# EAGLE board sparklecon_badge (EAGLE 7.6.0)
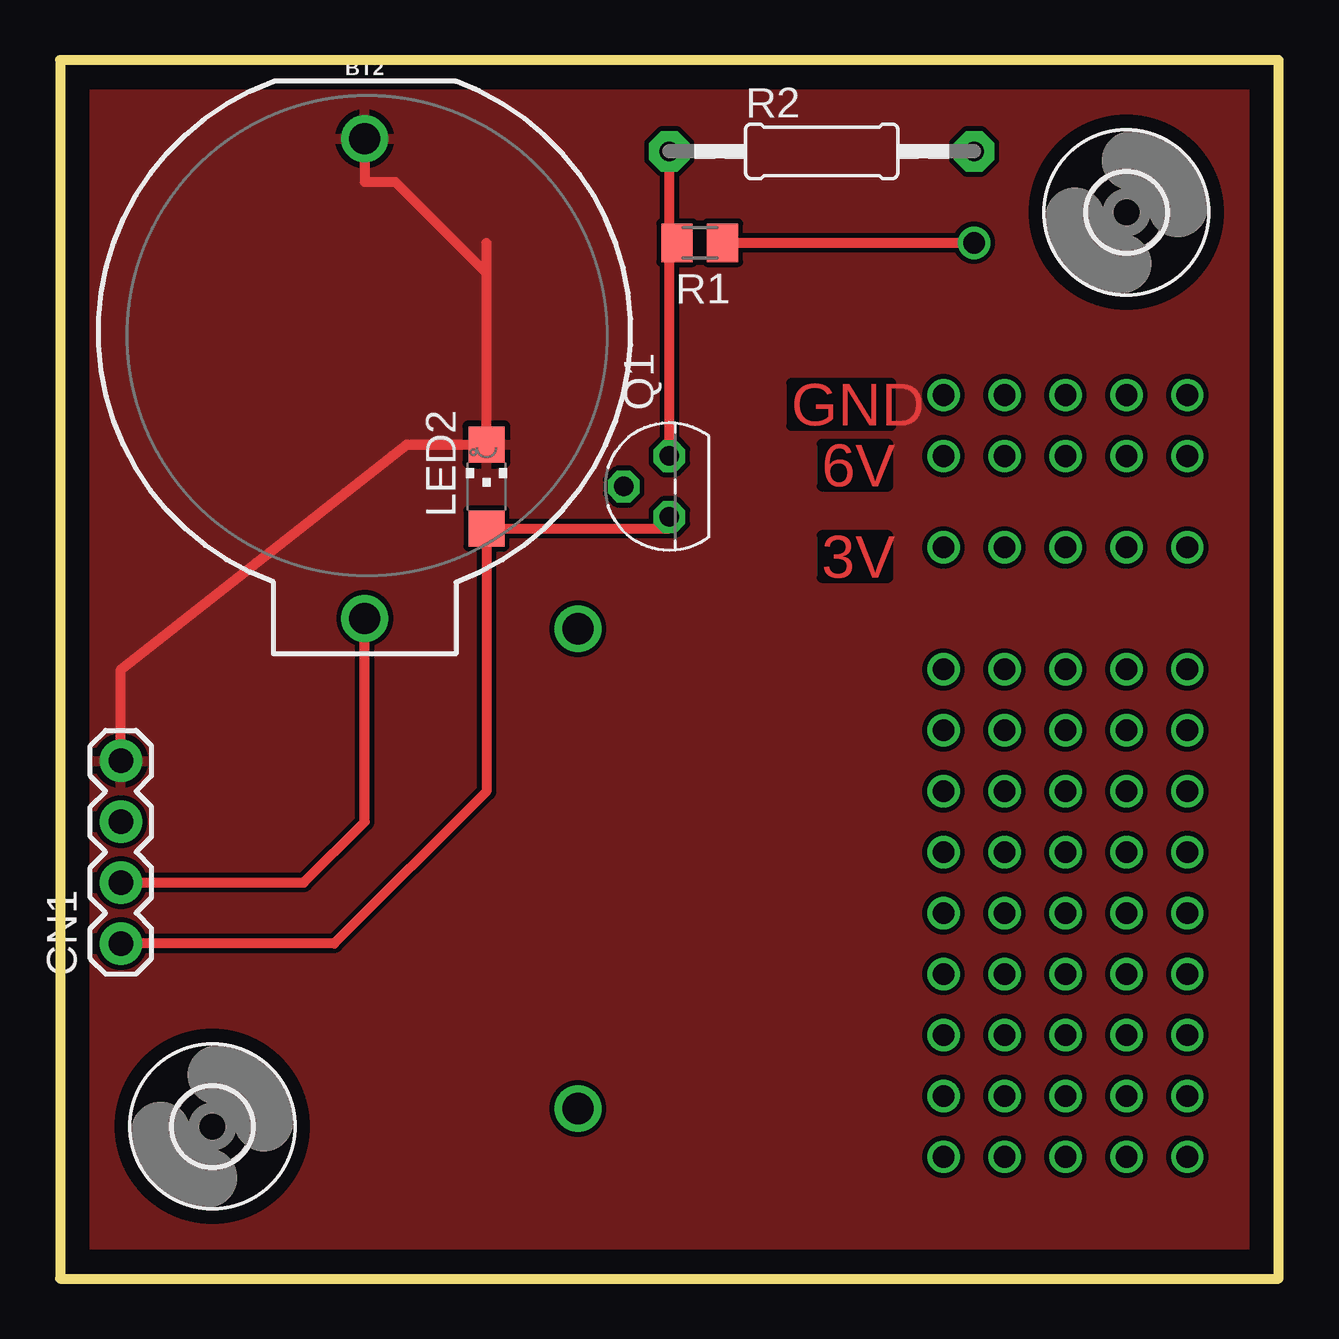
[diagram p0: board, top side]
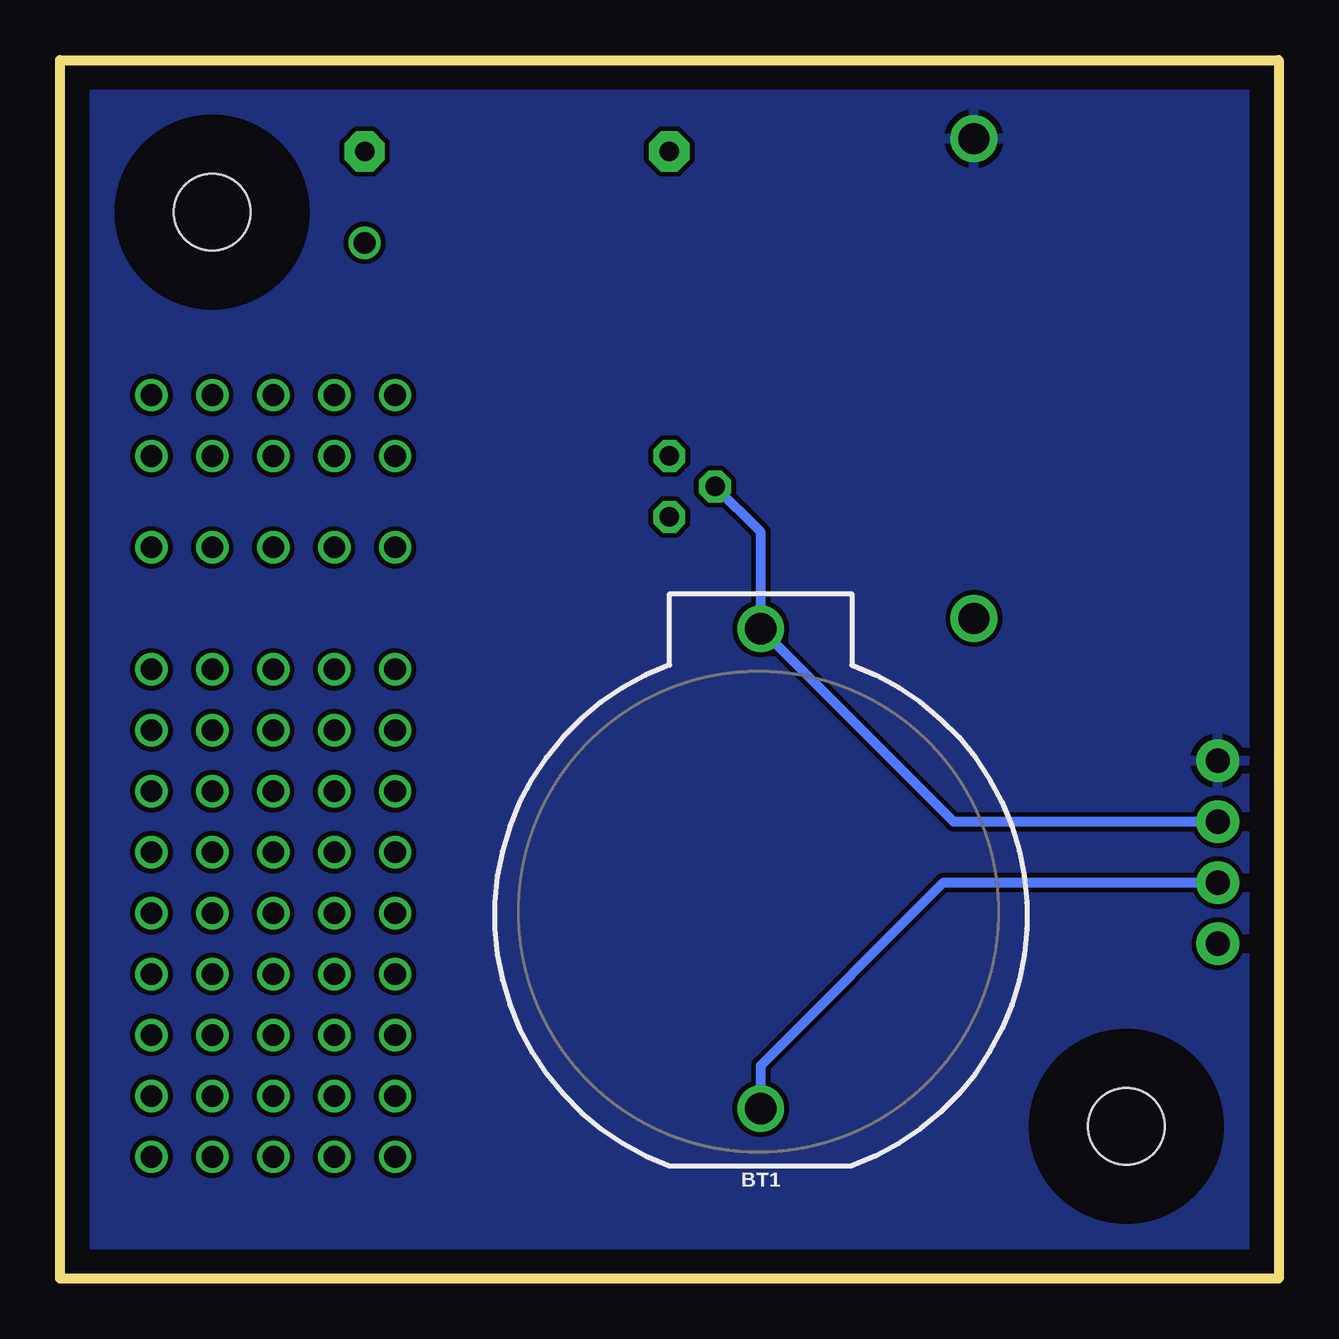
[diagram p1: board, bottom side, seen from below]

Size 50.8 x 50.8 mm. Coordinates in mm from the lower left corner, seen from the top.
Outline: 0,50.8 0,0 50.8,0 50.8,50.8 0,50.8
Copper layers (1*16): Top 0.035mm / dielectric 1.5mm / Bottom 0.035mm
Design rules "default": minimum track width 10mil, minimum drill 24mil, track to track 8mil, track to pad 8mil, pad to pad 8mil, via to via 8mil, smd to smd 8mil, copper to edge 40mil, drill to drill 8mil, minimum pad ring 10mil, minimum via ring 8mil, stop-mask expansion 4mil, vias tented up to drill 0mil, thermal gap 10mil

## Footprints (pad centres in the part's own frame; a part is rotated, then mirrored left to right if it is on the bottom)
BATTCOM_20MM_PTH = drill 1.3: 1 11.85,0; 2 -8.15,0
1X04-BIG = drill 1.016 pad 1.778: 1 0,0; 2 2.54,0; 3 5.08,0; 4 7.62,0
3,2 = hole 3.2: 0,0
CHIPLED_1206 = smd 1.5 x 1.5: A 0,-1.75; C 0,1.75
TO92 = drill 0.813 octagon: 1 1.27,0; 2 0,1.905; 3 -1.27,0
M0805 = smd 1.3 x 1.6: 1 -0.95,0; 2 0.95,0
0207/12 = drill 0.813 pad 1.676 octagon: 1 -6.35,0; 2 6.35,0

## Placement (x,y rotation side)
BT1  [BATTCOM_20MM_PTH]  21.59,15.24 90 bottom
BT2  [BATTCOM_20MM_PTH]  12.7,39.37 270 top
CN1  1X4-BIG  [1X04-BIG]  2.54,13.97 90 top
H1  MOUNT-HOLE3.2  [3,2]  6.35,6.35 0 top
H2  MOUNT-HOLE3.2  [3,2]  44.45,44.45 0 top
LED2  [CHIPLED_1206]  17.78,33.02 0 top
Q1  J113  [TO92]  25.4,33.02 90 top
R1  [M0805]  26.67,43.18 180 top
R2  [0207/12]  31.75,46.99 0 top

## Library data of the parts
BT1 BT2 = SparkFun-Batteries; PROD_ID: BATT-09031; SF_SKU: PRT-00783
CN1 LED2 R2 = adafruit
H1 H2 = holes
Q1 = transistor-fet
R1 = resistor

## Nets
3V: BT1.2 BT2.1 CN1.2
6V: BT1.1 CN1.3 Q1.2
GND: BT2.2 CN1.4 LED2.C
N$1: Q1.1 R1.2 R2.1
TRACE_OUT: CN1.1 LED2.A Q1.3

## Tracks (layer width: path | path; a pad name or v marks a point on that pad's centre or on a via)
3V
  Top 0.406: CN1.2 10.16,16.51 12.7,19.05 BT2.1
  Bottom 0.406: BT1.2 21.59,8.89 13.97,16.51 CN1.2
6V
  Bottom 0.406: Q1.2 21.59,31.11 BT1.1 13.55,19.05 CN1.3
GND
  Top 0.406: 17.78,41.91 LED2.C 14.45,34.77 2.54,25.4 CN1.4 | BT2.2 12.7,45.72 13.97,45.72 17.78,41.91 | 17.78,41.91 17.78,42.44 17.78,43.18
  pour Bottom: 0,50.8 50.8,50.8 50.8,0 0,0
  pour Top: 0,50.8 50.8,50.8 50.8,0 0,0
N$1
  Top 0.406: Q1.1 25.4,43.18 | 25.4,43.18 R2.1 | R1.2 25.4,43.18
N$2  (via drill 0.9)
  other vias: 41.91,34.29
N$3  (via drill 0.9)
  other vias: 39.37,34.29
N$4  (via drill 0.9)
  other vias: 36.83,34.29
N$5  (via drill 0.9)
  other vias: 36.83,15.24
N$6  (via drill 0.9)
  other vias: 39.37,15.24
N$7  (via drill 0.9)
  other vias: 41.91,15.24
N$8  (via drill 0.9)
  other vias: 44.45,15.24
N$9  (via drill 0.9)
  other vias: 46.99,15.24
N$10  (via drill 0.9)
  other vias: 36.83,36.83
N$11  (via drill 0.9)
  other vias: 39.37,36.83
N$12  (via drill 0.9)
  other vias: 41.91,36.83
N$13  (via drill 0.9)
  other vias: 44.45,36.83
N$14  (via drill 0.9)
  other vias: 36.83,30.48
N$15  (via drill 0.9)
  other vias: 39.37,30.48
N$16  (via drill 0.9)
  other vias: 41.91,30.48
N$17  (via drill 0.9)
  other vias: 44.45,30.48
N$18  (via drill 0.9)
  other vias: 46.99,30.48
N$19  (via drill 0.9)
  other vias: 46.99,36.83
N$20  (via drill 0.9)
  other vias: 36.83,12.7
N$21  (via drill 0.9)
  other vias: 39.37,12.7
N$22  (via drill 0.9)
  other vias: 41.91,12.7
N$23  (via drill 0.9)
  other vias: 44.45,12.7
N$24  (via drill 0.9)
  other vias: 46.99,12.7
N$25  (via drill 0.9)
  other vias: 36.83,10.16
N$26  (via drill 0.9)
  other vias: 36.83,25.4
N$27  (via drill 0.9)
  other vias: 39.37,25.4
N$28  (via drill 0.9)
  other vias: 41.91,25.4
N$29  (via drill 0.9)
  other vias: 44.45,25.4
N$30  (via drill 0.9)
  other vias: 46.99,25.4
N$31  (via drill 0.9)
  other vias: 39.37,10.16
N$32  (via drill 0.9)
  other vias: 41.91,10.16
N$33  (via drill 0.9)
  other vias: 46.99,22.86
N$34  (via drill 0.9)
  other vias: 44.45,22.86
N$35  (via drill 0.9)
  other vias: 41.91,22.86
N$36  (via drill 0.9)
  other vias: 39.37,22.86
N$37  (via drill 0.9)
  other vias: 36.83,22.86
N$38  (via drill 0.9)
  other vias: 36.83,20.32
N$39  (via drill 0.9)
  other vias: 39.37,20.32
N$40  (via drill 0.9)
  other vias: 41.91,20.32
N$41  (via drill 0.9)
  other vias: 44.45,20.32
N$42  (via drill 0.9)
  other vias: 46.99,20.32
N$43  (via drill 0.9)
  other vias: 44.45,10.16
N$44  (via drill 0.9)
  other vias: 36.83,17.78
N$45  (via drill 0.9)
  other vias: 46.99,10.16
N$46  (via drill 0.9)
  other vias: 39.37,17.78
N$47  (via drill 0.9)
  other vias: 46.99,7.62
N$48  (via drill 0.9)
  other vias: 41.91,17.78
N$49  (via drill 0.9)
  other vias: 46.99,5.08
N$50  (via drill 0.9)
  other vias: 44.45,17.78
N$51  (via drill 0.9)
  other vias: 44.45,5.08
N$52  (via drill 0.9)
  other vias: 44.45,34.29
N$53  (via drill 0.9)
  other vias: 41.91,5.08
N$54  (via drill 0.9)
  other vias: 39.37,5.08
N$55  (via drill 0.9)
  other vias: 36.83,5.08
N$56  (via drill 0.9)
  other vias: 36.83,7.62
N$57  (via drill 0.9)
  other vias: 39.37,7.62
N$58  (via drill 0.9)
  other vias: 41.91,7.62
N$59  (via drill 0.9)
  other vias: 44.45,7.62
N$60  (via drill 0.9)
  Top 0.406: 27.94,43.18 v38.1,43.18
N$61  (via drill 0.9)
  other vias: 46.99,34.29
N$62  (via drill 0.9)
  other vias: 46.99,17.78
TRACE_OUT
  Top 0.406: Q1.3 25.4,31.27 LED2.A 17.78,20.32 11.43,13.97 CN1.1

## Text on the board
Top: GND | 6V | 3V